# Altium PCB extension_board.PcbDoc
Units mil, origin at the board's own origin, x right, y up, seen from the top; angles counter-clockwise.
Board outline 1335.98 x 1844.06 mil, 2 copper layers (Top Layer, Bottom Layer); 16 components, 16 nets, 56 pads, 3 vias.
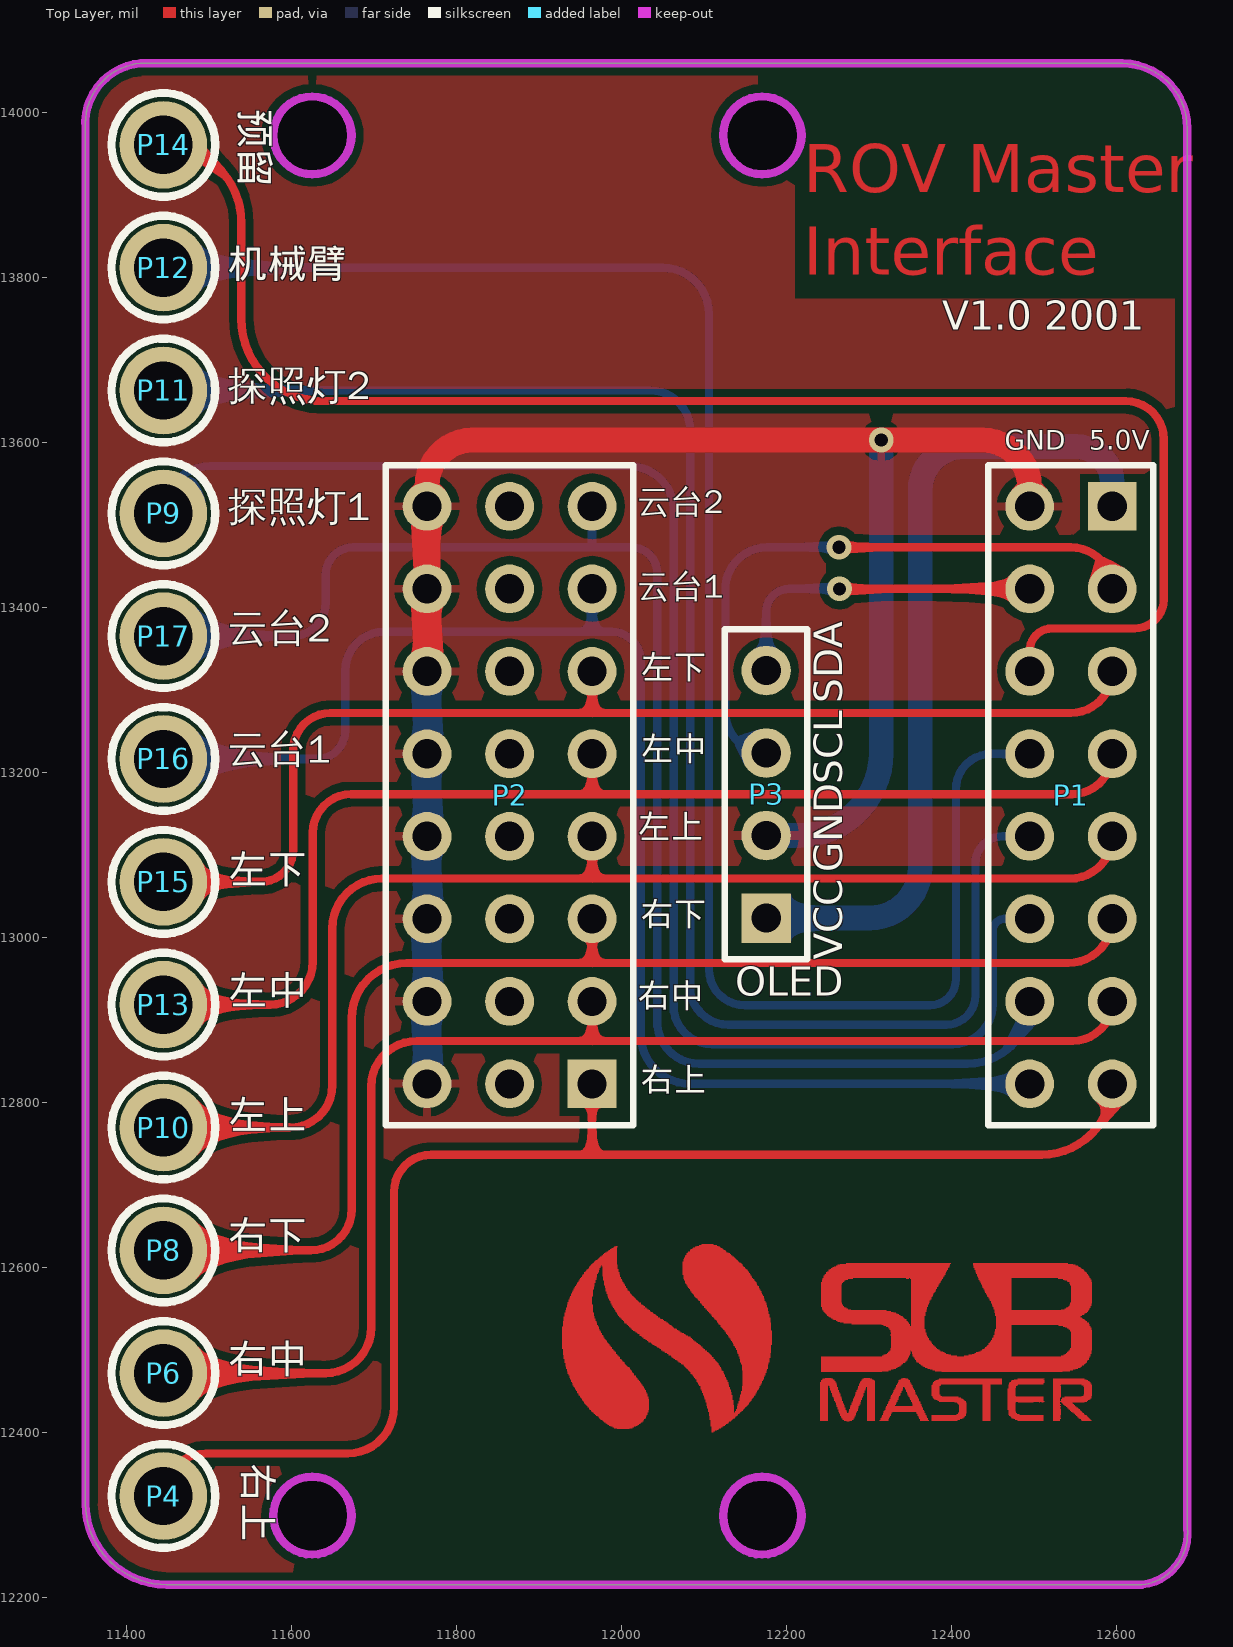
[diagram p0: Top Layer view]
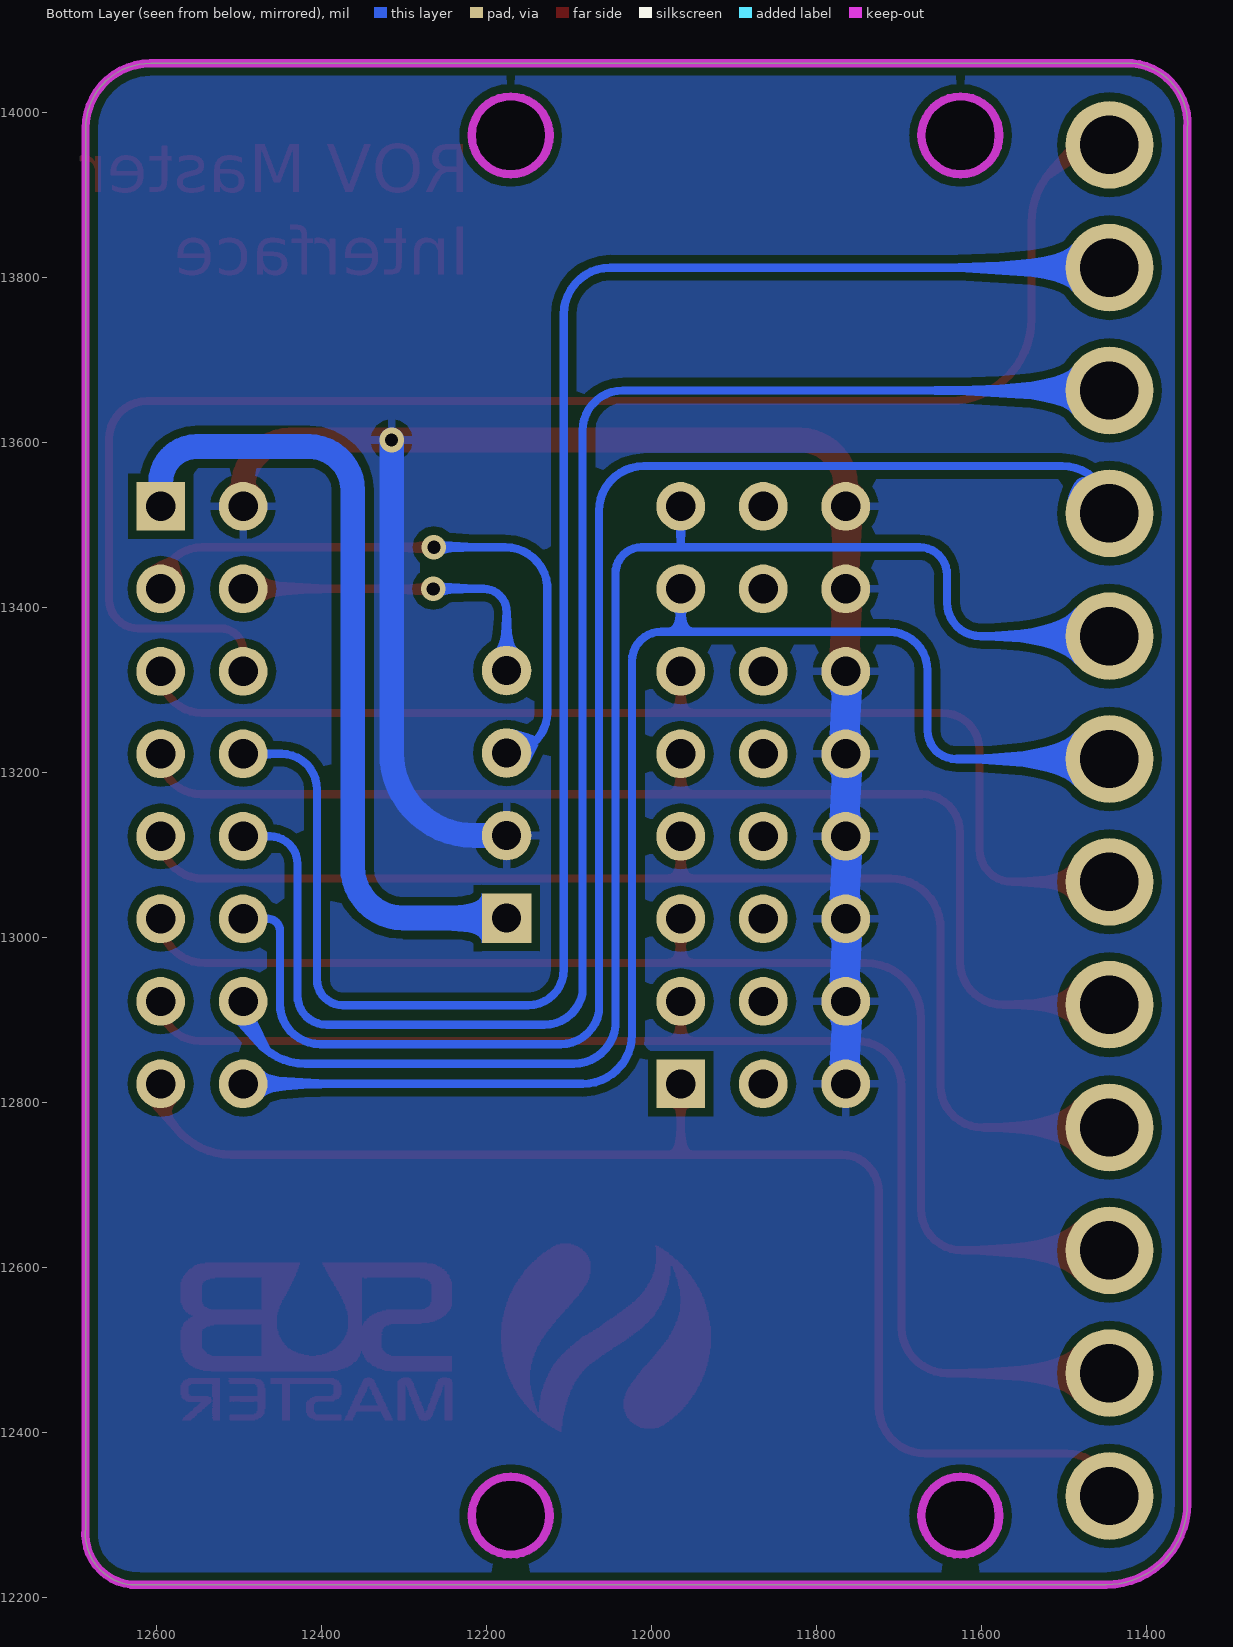
[diagram p1: Bottom Layer view, seen from below]

## Layer stack, top to bottom
Top Solder: solder mask 0.4, Solder Resist, Dk 3.5
Top Layer: signal copper 1.4
Dielectric 1: dielectric 12.6, FR-4, Dk 4.8
Bottom Layer: signal copper 1.4
Bottom Solder: solder mask 0.4, Solder Resist, Dk 3.5

## Board outline
11350.47,12313.53 11350.47,13980.31 cw(c11423.27,13986.26) 11417.32,14059.06 12607.17,14059.06 cw(c12607.17,13980.31) 12685.91,13980.31 12685.91,12283.46 cw(c12624.22,12276.69) 12631,12215 11449,12215 cw(c11449,12313.53)
cut-out: 11630.37,13924.47 cw(c11630.37,13971.72) 11583.13,13971.72 cw(c11630.37,13971.72) 11630.37,14018.96 cw(c11630.37,13971.72) 11677.61,13971.72 cw(c11630.37,13971.72)
cut-out: 12175.65,13924.47 cw(c12175.65,13971.72) 12128.4,13971.72 cw(c12175.65,13971.72) 12175.65,14018.96 cw(c12175.65,13971.72) 12222.89,13971.72 cw(c12175.65,13971.72)
cut-out: 12175.65,12251.45 cw(c12175.65,12298.69) 12128.4,12298.69 cw(c12175.65,12298.69) 12175.65,12345.94 cw(c12175.65,12298.69) 12222.89,12298.69 cw(c12175.65,12298.69)
cut-out: 11630.37,12251.45 cw(c11630.37,12298.69) 11583.13,12298.69 cw(c11630.37,12298.69) 11630.37,12345.94 cw(c11630.37,12298.69) 11677.61,12298.69 cw(c11630.37,12298.69)

## Design rules (kind name [scope] priority, off if disabled: settings)
Clearance Clearance_1 [All] p1: gap=10
PolygonConnect [All] p1: connectstyle=Relief reliefconductorwidth=10 reliefentries=4 polygonreliefangle="90 Angle" airgapwidth=10
RoutingVias [All] p1: holewidth=28 width=50 viastyle="Through Hole" minholewidth=28 minwidth=50 maxholewidth=28 maxwidth=50
SolderMaskExpansion [All] p1: expansion=4
Width [All] p1: maxlimit=200 minlimit=5 preferedwidth=10 minimp=50.000000 maximp=50.000000 favimp=50.000000
30 further rules are at their usual default settings.

## Components (designator, comment, footprint, x,y, rotation, side; value= is the part's Value field where it differs from the comment)
P1 "" "HEADER 2X8 反向" 12486.19,12825.94 r90 top
P2 "" "Header 8X3" 11964.57,12821.04 r90 top
P3 "OLED" OLED12864 12181.1,13149.61 r90 top locked
P4 "右上" "PIN 1" 11448.82,12322.48 r270 top
P6 "右中" "PIN 1" 11448.82,12471.37 r270 top
P8 "右下" "PIN 1" 11448.82,12620.26 r270 top
P9 "探照灯1" "PIN 1" 11448.82,13513.6 r270 top
P10 "左上" "PIN 1" 11448.82,12769.15 r270 top
P11 "探照灯2" "PIN 1" 11448.82,13662.49 r270 top
P12 "机械臂" "PIN 1" 11448.82,13811.38 r270 top
P13 "左中" "PIN 1" 11448.82,12918.04 r270 top
P14 "预留" "PIN 1" 11448.82,13960.27 r270 top
P15 "左下" "PIN 1" 11448.82,13066.93 r270 top
P16 "云台1" "PIN 1" 11448.82,13215.82 r270 top
P17 "云台2" "PIN 1" 11448.82,13364.71 r270 top
? "" "Sub master logo" 12043.31,12507.87 r0 top

## Footprints (in the part's own frame and the unit in brackets; to place one, negate y for a bottom-side part, rotate by r counter-clockwise, add the part's x,y. Pads: shape width x height; smd on the part's side, far side on the other; paste and mask are expansions set on the pad)
"HEADER 2X8 反向" [mm]
  round 1.5 hole 0.9: 1(-0.099,-2.763) 2(-0.099,-0.223) 3(2.441,-2.763) 4(2.441,-0.223) 5(4.981,-2.763) 6(4.981,-0.223) 7(7.521,-2.763) 8(7.521,-0.223) 9(10.061,-2.763) 10(10.061,-0.223) 11(12.601,-2.763) 12(12.601,-0.223) 13(15.141,-2.763) 14(15.141,-0.223) 16(17.681,-0.223)
  rect 1.5x1.5 hole 0.9: 15(17.681,-2.763)
  silkscreen extent -1.37,-4.03 18.95,1.05, body extent -1.45,-4.03 18.87,1.05, height 7.58
"Header 8X3" [mm]
  rect 1.5x1.5 hole 0.9: 1(0.025,0)
  round 1.5 hole 0.9: 2(0.025,2.54) 3(0.025,5.08) 4(2.565,0) 5(2.565,2.54) 6(2.565,5.08) 7(5.105,0) 8(5.105,2.54) 9(5.105,5.08) 10(7.645,0) 11(7.645,2.54) 12(7.645,5.08) 13(10.185,0) 14(10.185,2.54) 15(10.185,5.08) 16(12.725,0) 17(12.725,2.54) 18(12.725,5.08) 19(15.265,0) 20(15.265,2.54) 21(15.265,5.08) 22(17.805,0) 23(17.805,2.54) 24(17.805,5.08)
  silkscreen extent -1.24,-1.27 19.08,6.35, body extent -1.24,-1.27 19.08,6.35, height 7.58
OLED12864 [mm]
  rect 1.524x1.524 hole 0.9: 1(-3.215,0.14)
  round 1.524 hole 0.9: 2(-0.675,0.14) 3(1.865,0.14) 4(4.405,0.14)
  silkscreen extent -4.48,-1.13 5.68,1.41, body extent -12.8,-25.45 13.9,2.41, height 13.47
"PIN 1" [mm]
  round 2.7 hole 1.8: 1(0,-0.1)
  silkscreen extent -1.6,-1.7 1.6,1.5
"Sub master logo" [mil]
  Top Layer drawing of 1550 lines, arcs and shapes, not listed

## Part data
P1: library part "Header 2X8"
P2: library part "Header 8X3"
P3: library part 接线端子-4PIN, "4PIN"
P4 P6 P8 P9 P10 P11 P12 P13 P14 P15 P16 P17: library part 测试点, "测试点"
?: library part "Sub Master logo"

## Via types
v1: diameter 30, hole 16, Top Layer to Bottom Layer, 3 vias

## Nets (pads, with @x,y where several pads share a name; then routed paths per layer and width w, separated by ;. In a path a pad name is that pad's centre, name@x,y a point inside that pad or via, vN(x,y) a via of type N, cw(c..) or ccw(c..) an arc to the next point about the centre after c; other vN are vias at no path point)
DGND: P1.16 P2.3 P2.6 P2.9 P2.12 P2.15 P2.18 P2.21 P2.24 P3.2 | length 2118.5
  Top Layer w30: P2.18 P2.21 11764.57,13547.26 cw(c11819.67,13547.26) 11819.67,13602.36 12437.56,13602.36 cw(c12437.56,13544.96) 12494.97,13544.96 P1.16
  Bottom Layer w30: P2.3 P2.6 P2.9 P2.12 P2.15 P2.18 ; P3.2 12214.96,13123.03 ccw(c12214.96,13223.03) 12314.96,13223.03 v1(12314.96,13602.36)
I2C2_SCL: P1.13 P3.3 | length 753.3
  Top Layer w10: v1(12263.78,13472.44) 12544.57,13472.44 cw(c12544.57,13422.04) P1.13
  Bottom Layer w10: P3.3 cw(c12175.59,13272.32) 12126.3,13272.32 12126.3,13426.93 cw(c12177.17,13421.26) 12177.17,13472.44 v1(12263.78,13472.44)
I2C2_SDA: P1.14 P3.4 | length 406.5
  Top Layer w10: v1(12264.56,13422.04) P1.14
  Bottom Layer w10: P3.4 12175.59,13394.24 cw(c12203.39,13394.24) 12203.39,13422.04 v1(12264.56,13422.04)
PWM0: P1.1 P2.1 P4.1 | length 1633
  Top Layer w10: P4.1 cw(c11496.42,12322.48) 11496.42,12374.02 11668.14,12374.02 ccw(c11668.14,12430.28) 11724.41,12430.28 11724.41,12691.05 cw(c11769.58,12691.05) 11769.58,12736.22 11964.57,12736.22 ; P2.1 11964.57,12736.22 ; P1.1 cw(c12509.15,12822.04) 12509.15,12736.22 11964.57,12736.22
PWM1: P1.3 P2.4 P6.1 | length 1580.7
  Top Layer w10: P6.1 11641.26,12471.37 ccw(c11641.26,12526.95) 11696.85,12526.95 11696.85,12818.9 cw(c11751.97,12818.9) 11751.97,12874.02 11964.57,12874.02 ; P2.4 11964.57,12874.02 ; P1.3 cw(c12546.94,12922.04) 12546.94,12874.02 11964.57,12874.02
PWM2: P1.5 P2.7 P8.1 | length 1532.4
  Top Layer w10: P8.1 11623.53,12620.26 ccw(c11623.53,12669.96) 11673.23,12669.96 11673.23,12901.57 cw(c11740.16,12901.57) 11740.16,12968.5 11964.57,12968.5 ; P2.7 11964.57,12968.5 ; P1.5 cw(c12541.43,13022.04) 12541.43,12968.5 11964.57,12968.5
PWM3: P1.7 P2.10 P10.1 | length 1484.5
  Top Layer w10: P10.1 11598.78,12769.15 ccw(c11598.78,12819.98) 11649.61,12819.98 11649.61,13010.53 cw(c11709.94,13010.53) 11709.94,13070.87 11964.57,13070.87 ; P2.10 11964.57,13070.87 ; P1.7 cw(c12543.8,13122.04) 12543.8,13070.87 11964.57,13070.87
PWM4: P1.9 P2.13 P13.1 | length 1439.5
  Top Layer w10: P13.1 11574.04,12918.04 ccw(c11574.04,12969.99) 11625.98,12969.99 11625.98,13126.38 cw(c11672.83,13126.38) 11672.83,13173.23 11964.57,13173.23 ; P2.13 11964.57,13173.23 ; P1.9 cw(c12546.16,13222.04) 12546.16,13173.23 11964.57,13173.23
PWM5: P1.11 P2.16 P15.1 | length 1397.7
  Top Layer w10: P15.1 11562.99,13066.93 ccw(c11562.99,13106.3) 11602.36,13106.3 11602.36,13226.49 cw(c11647.53,13226.49) 11647.53,13271.65 11964.57,13271.65 ; P2.16 11964.57,13271.65 ; P1.11 cw(c12544.58,13322.04) 12544.58,13271.65 11964.57,13271.65
PWM6: P1.2 P2.19 P16.1 | length 1728.4
  Bottom Layer w10: P16.1 11630.91,13215.82 ccw(c11630.91,13250.27) 11665.35,13250.27 11665.35,13322.83 cw(c11712.6,13322.83) 11712.6,13370.08 11964.57,13370.08 ; P2.19 11964.57,13370.08 ; P1.2 12083.47,12822.04 cw(c12083.47,12881.89) 12023.62,12881.89 12023.62,13334.65 ccw(c11988.19,13334.65) 11988.19,13370.08 11964.57,13370.08
PWM7: P1.4 P2.22 P17.1 | length 1811.8
  Bottom Layer w10: P17.1 11600.93,13364.71 ccw(c11600.93,13405.51) 11641.73,13405.51 11641.73,13439.12 cw(c11675.06,13439.12) 11675.06,13472.44 11968.5,13472.44 ; P2.22 11964.57,13476.38 ccw(c11968.5,13476.38) 11968.5,13472.44 ; P1.4 cw(c12419.39,12922.04) 12419.39,12846.46 12094.49,12846.46 cw(c12094.49,12897.64) 12043.62,12891.97 12043.62,13440.87 ccw(c12012.05,13440.87) 12012.05,13472.44 11968.5,13472.44
PWM8: P1.6 P9.1 | length 1865.6
  Bottom Layer w10: P9.1 cw(c11502.15,13513.6) 11502.15,13570.87 12009.36,13570.87 cw(c12009.36,13516.61) 12063.62,13516.61 12063.62,12909.63 ccw(c12110.24,12917.32) 12110.24,12870.08 12401.57,12870.08 ccw(c12401.57,12918.94) 12450.44,12918.94 12450.44,13008.04 cw(c12464.44,13008.04) 12464.44,13022.04 P1.6
PWM9: P1.8 P11.1 | length 1977.4
  Bottom Layer w10: P11.1 12034.83,13662.49 cw(c12034.83,13613.7) 12083.62,13613.7 12083.62,12931.54 ccw(c12129.92,12940.94) 12129.92,12893.7 12393.7,12893.7 ccw(c12393.7,12929.13) 12429.13,12929.13 12429.13,13088.73 cw(c12462.44,13088.73) 12462.44,13122.04 P1.8
PWM10: P1.10 P12.1 | length 2174.1
  Bottom Layer w10: P12.1 12049.78,13811.38 cw(c12049.78,13754.87) 12106.3,13754.87 12106.3,12960.63 ccw(c12149.61,12960.63) 12149.61,12917.32 12374.02,12917.32 ccw(c12374.02,12948.82) 12405.51,12948.82 12405.51,13179.07 cw(c12448.48,13179.07) 12448.48,13222.04 P1.10
PWM11: P1.12 P14.1 | length 1883.3
  Top Layer w10: P14.1 cw(c11444.88,13865.78) 11535.15,13893.7 cw(c11444.88,13865.78) 11539.37,13865.78 11539.37,13749.61 ccw(c11639.37,13749.61) 11639.37,13649.61 12611.25,13649.61 cw(c12611.25,13603.38) 12657.48,13603.38 12657.48,13409.45 cw(c12622.05,13409.45) 12622.05,13374.02 12521.89,13374.02 ccw(c12521.89,13347.09) 12494.97,13347.09 P1.12
VDD_5.0V: P1.15 P3.1 | length 995.4
  Bottom Layer w30: P3.1 12300.82,13023.03 ccw(c12300.82,13084.42) 12362.2,13084.42 12362.2,13541.43 cw(c12415.26,13541.43) 12415.26,13594.49 12551.18,13594.49 cw(c12551.18,13550.7) 12594.97,13550.7 P1.15
pads on no net: P2.2 P2.5 P2.8 P2.11 P2.14 P2.17 P2.20 P2.23

## Polygon pours and split planes (outlines as drawn)
DGND on Top Layer "Top Layer-No Net" (solid, remove dead copper, pour order 6): 11216.54,13740.16 11216.54,14037.8 cw(c11316.54,14037.8) 11316.54,14137.8 11437.01,14137.8 12714.96,14137.8 cw(c12714.96,14037.8) 12814.96,14037.8 12814.96,13665.35 12814.96,12170.87 cw(c12714.96,12170.87) 12714.96,12070.87 12547.24,12070.87 11316.54,12070.87 cw(c11316.54,12170.87) 11216.54,12170.87 11216.54,12350.39
DGND on Bottom Layer "Top Layer-No Net" (solid, remove dead copper, pour order 8): 11200.79,13625.98 11200.79,14124.41 cw(c11300.79,14124.41) 11300.79,14224.41 11413.39,14224.41 12734.65,14224.41 cw(c12734.65,14124.41) 12834.65,14124.41 12834.65,13649.61 12834.65,12162.99 cw(c12734.65,12162.99) 12734.65,12062.99 12444.88,12062.99 11300.79,12062.99 cw(c11300.79,12162.99) 11200.79,12162.99 11200.79,12543.31

## Keep-outs
Keep-Out Layer:
  circle w10: c11625.37,13971.72 r47.24
  circle w10: c12170.65,13971.72 r47.24
  circle w10: c12170.65,12298.69 r47.24
  circle w10: c11625.37,12298.69 r47.24
  lines w10: 11350.47,12313.53 ccw(c11449,12313.53) 11449,12215 12631,12215 ccw(c12624.22,12276.69) 12685.91,12283.46 12685.91,13980.31 ccw(c12607.17,13980.31) 12607.17,14059.05 12458,14059.06 11417.32,14059.06 ccw(c11423.27,13986.26) 11350.47,13980.31 11350.47,12313.53

## Other copper
Top Layer:
  text "ROV Master / Interface" at 12220.47,13783.46 h100

## Silkscreen, mask and mechanical layers (free items; w line width, h text height)
Top Overlay:
  text "V1.0 2001" at 12389.13,13724.72 h60
  text "GND" at 12464.57,13582.68 h40
  text "5.0V" at 12566.93,13582.68 h40
  text "云台2" at 12019.68,13503.94 h50
  text "云台1" at 12019.68,13401.57 h50
  text "左下" at 12023.62,13303.15 h50
  text "左中" at 12023.62,13204.72 h50
  text "左上" at 12019.68,13110.24 h50
  text "右下" at 12023.62,13003.94 h50
  text "右中" at 12019.68,12905.51 h50
  text "右上" at 12023.62,12803.15 h50
Top Solder:
  text "ROV Master / Interface" at 12220.47,13783.46 h100

## Text inside footprints (layer, text, board x,y; h text height)
P3: Top Overlay "VCC" at 12279.53,12972.44 h59.06 r90; Top Overlay "GND" at 12279.53,13078.74 h59.06 r90; Top Overlay "SCL" at 12279.53,13185.04 h59.06 r90; Top Overlay "SDA" at 12279.53,13283.46 h59.06 r90